# Altium PCB PONG_2.PcbDoc (part 3 of 3)
Units mm, origin at the board's own origin, x right, y up, seen from the top; angles counter-clockwise.
Board outline 310.01 x 220.09 mm, 2 copper layers (Top Layer, Bottom Layer); 106 components, 226 nets, 1005 pads, 373 vias.
Unrouted connection lines stored in the file: 5.
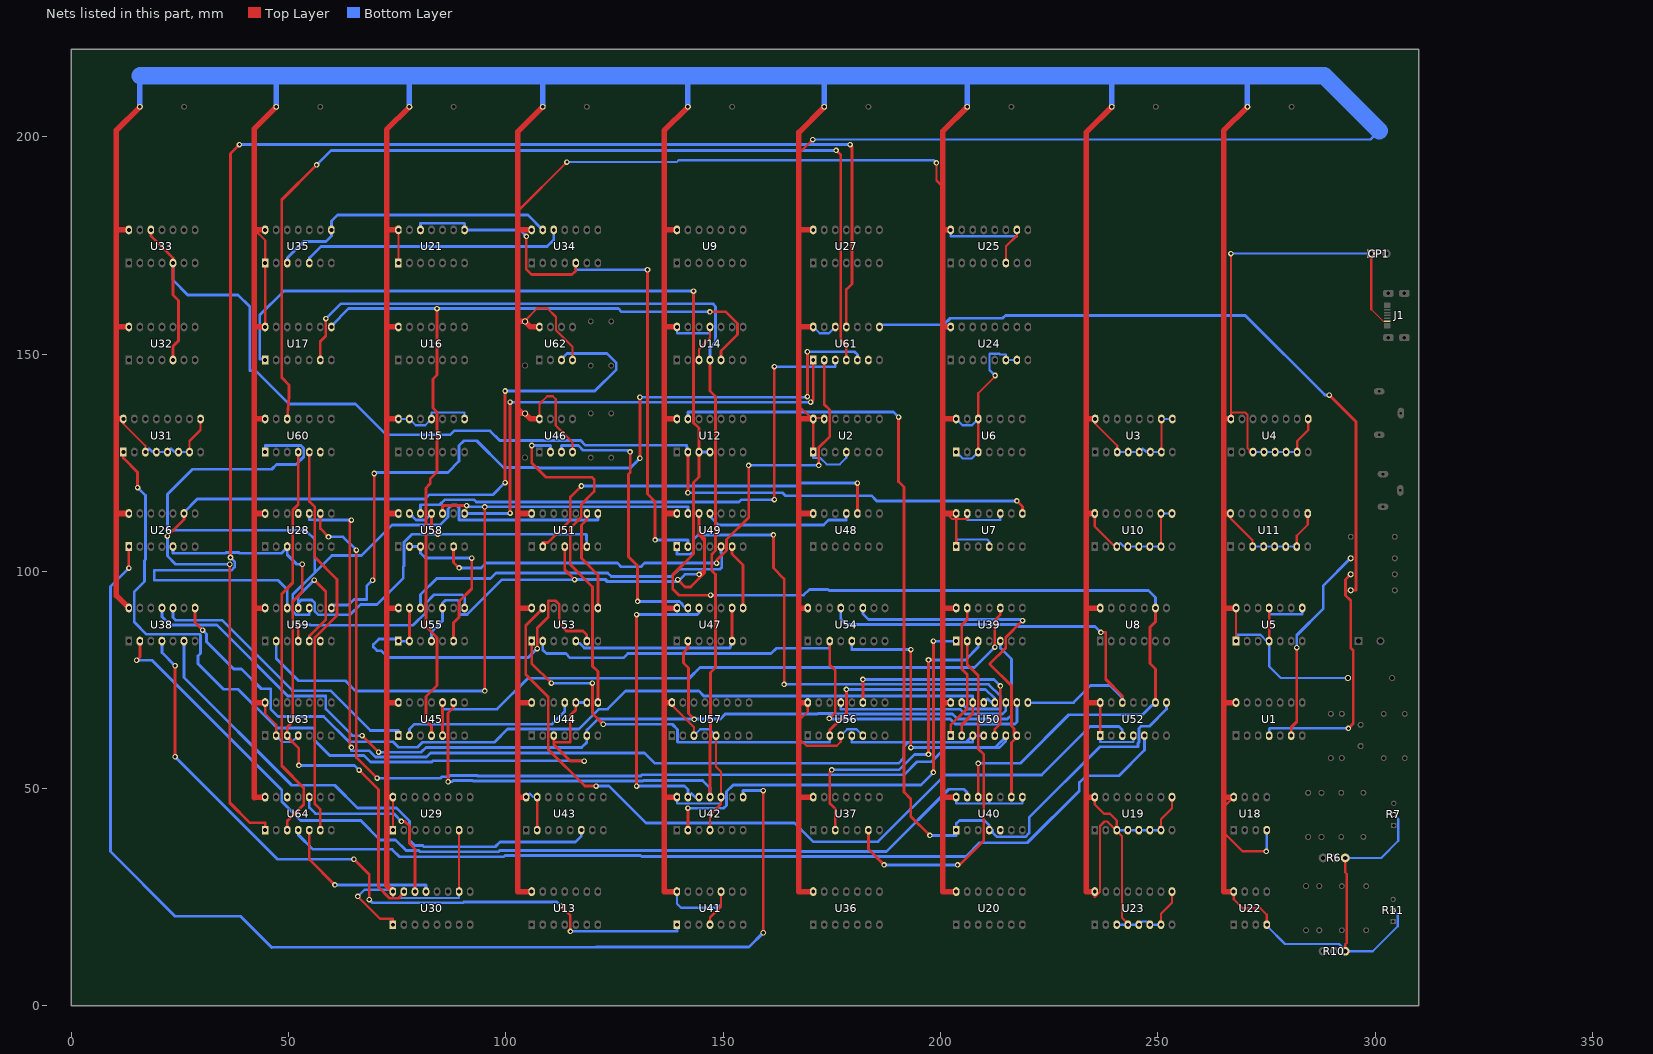
[diagram p3: the nets of this part, all layers, seen from the top]

## Via types
v1: diameter 1.27, hole 0.711, Top Layer to Bottom Layer, 373 vias

## Nets (pads, with @x,y where several pads share a name; then routed paths per layer and width w, separated by ;. In a path a pad name is that pad's centre, name@x,y a point inside that pad or via, vN(x,y) a via of type N, cw(c..) or ccw(c..) an arc to the next point about the centre after c; other vN are vias at no path point) (continued)
NetU34_12: U34.12 U35.5 | length 61.4
  Bottom Layer w0.635: U35.5@54.737,170.942 54.737,172.085 57.404,174.752 109.474,174.752 110.989,176.267 U34.12@110.989,178.562
NetU34_13: U34.13 U35.3 U35.8 | length 67.5
  Bottom Layer w0.635: U35.3@49.657,170.942 49.657,172.085 53.467,175.895 58.547,175.895 59.817,177.165 U35.8@59.817,178.562 59.817,180.594 61.214,181.991 105.02,181.991 U34.13@108.449,178.562
NetU37_3: U37.3 U39.3 | length 74.1
  Top Layer w0.635: v1(174.955,54.305) 174.523,53.873 174.523,46.533 175.784,45.272 U37.3@175.784,40.422 ; v1(197.231,57.861) v1(197.231,79.604)
  Bottom Layer w0.635: v1(174.955,54.305) 190.431,54.305 193.987,57.861 v1(197.231,57.861) ; v1(197.231,79.604) 205.736,79.604 208.682,82.55 U39.3@208.682,83.929
NetU37_6: U37.6 U39.2 | length 82.2
  Top Layer w0.635: U37.6@183.404,40.422 183.404,36.068 v1(187.036,32.436) ; v1(203.937,32.436) 204.387,32.436 209.956,38.005 209.956,57.861 208.686,59.131 208.686,75.997 206.142,78.541 U39.2@206.142,83.929
  Bottom Layer w0.635: v1(187.036,32.436) v1(203.937,32.436)
NetU38_2: U38.2 U40.13 | length 223.1
  Top Layer w0.635: v1(15.011,79.527) 15.748,80.264 U38.2@15.748,83.929
  Bottom Layer w0.635: v1(15.011,79.527) 18.505,79.527 48.387,49.645 48.387,47.015 52.756,42.647 66.573,42.647 71.044,38.176 74.6,38.176 77.041,35.735 79.953,35.735 80.222,35.466 98.281,35.466 98.572,35.758 167.436,35.758 167.691,35.504 187.548,35.504 201.879,49.835 205.38,49.835 206.142,49.073 U40.13@206.142,48.042
NetU38_4: U38.4 U41.1 | length 167.2
  Top Layer w0.635: v1(23.851,57.328) v1(23.851,78.257) ; v1(64.999,33.731) 68.529,30.201 v1(68.529,24.435) ; v1(112.573,23.038) 114.808,20.803 v1(114.808,17.145)
  Bottom Layer w0.635: U38.4@20.828,83.929 20.828,81.28 v1(23.851,78.257) ; v1(23.851,57.328) 47.447,33.731 v1(64.999,33.731) ; v1(68.529,24.435) 69.22,23.744 90.14,23.744 90.297,23.901 111.709,23.901 v1(112.573,23.038) ; v1(114.808,17.145) 139.33,17.145 U41.1@139.33,18.669
NetU38_6: U38.6 U43.6 | length 120.9
  Bottom Layer w0.635: U38.6@25.908,83.929 25.908,75.554 50.687,50.775 60.584,50.775 65.816,45.542 74.778,45.542 77.775,42.545 77.775,38.1 79.004,36.87 80.819,36.87 81.088,36.601 97.536,36.601 98.663,37.728 115.96,37.728 117.339,39.107 U43.6@117.339,40.422
NetU38_10: U38.10 U45.1 | length 66
  Bottom Layer w0.635: U38.10@23.368,91.549 23.368,89.36 23.971,88.757 34.604,88.757 50.826,72.535 59.635,72.535 68.78,63.39 75.243,63.39 U45.1@75.243,62.176
NetU39_1: U39.1 U42.2 | length 102.3
  Top Layer w0.635: U42.2@141.87,40.422 v1(141.87,45.491) ; v1(198.374,53.727) v1(198.374,83.922)
  Bottom Layer w0.635: v1(141.87,45.491) 150.114,45.491 150.77,46.148 150.77,49.301 152.302,50.833 195.48,50.833 v1(198.374,53.727) ; v1(198.374,83.922) 203.602,83.922 U39.1@203.602,83.929
NetU39_10: U39.10 U45.5 U45.10 | length 151.7
  Top Layer w0.635: U45.5@85.403,62.176 U45.10@85.403,69.796 ; v1(212.496,82.55) 212.496,88.752 213.762,90.018 U39.10@213.762,91.549
  Bottom Layer w0.635: U45.10@85.403,69.796 85.403,68.275 97.942,68.275 105.053,75.386 142.168,75.386 144.671,77.889 207.835,77.889 v1(212.496,82.55)
NetU39_13: U39.13 U50.1 | length 32
  Top Layer w0.635: U50.1@202.332,62.176 202.332,64.639 206.146,68.453 206.146,76.212 204.876,77.482 204.876,87.681 206.142,88.947 U39.13@206.142,91.549
NetU42_12: U42.12 U42.13 U47.12 | length 72.2
  Top Layer w0.635: v1(130.048,50.571) v1(130.048,90.035)
  Bottom Layer w0.635: v1(130.048,50.571) 132.588,50.571 132.613,50.597 141.046,50.597 141.87,49.773 U42.13@141.87,48.042 142.687,48.86 143.505,48.042 U42.12@144.41,48.042 ; v1(130.048,90.035) 144.021,90.035 144.41,90.424 U47.12@144.41,91.549
NetU44_8: U44.8 U46.2 | length 82
  Top Layer w0.635: v1(105.918,128.949) 105.918,124.904 109.156,121.666 119.736,121.666 120.294,121.107 120.294,118.358 117.329,115.392 117.329,112.477 114.808,109.957 114.808,101.502 119.888,96.422 119.888,78.156 121.149,76.895 U44.8@121.149,69.796
  Bottom Layer w0.635: v1(105.918,128.949) 110.236,128.949 U46.2@110.236,127.435
NetU46_3: U46.3 U47.13 | length 65.8
  Top Layer w0.635: v1(128.575,127.483) 128.575,122.758 128.194,122.377 128.194,103.353 130.277,101.27 v1(130.277,93.062)
  Bottom Layer w0.635: U46.3@112.776,127.435 112.776,128.949 116.662,128.949 117.763,127.848 127.901,127.848 128.266,127.483 v1(128.575,127.483) ; v1(130.277,93.062) 139.954,93.062 140.589,92.427 140.589,92.278 141.072,91.796 141.87,91.796 U47.13@141.87,91.549
NetU47_6: U47.6 U47.9 U53.5 | length 45.7
  Top Layer w0.635: U47.6@152.03,83.929 U47.9@152.03,91.549
  Bottom Layer w0.635: U53.5@116.069,83.929 116.069,83.467 116.922,83.467 118.025,82.364 151.552,82.364 U47.6@152.03,83.929
NetU47_8: U47.8 U49.6 | length 15.2
  Top Layer w0.635: U49.6@152.03,105.682 152.03,103.977 154.57,101.437 U47.8@154.57,91.549
NetU48_10: U48.10 U51.2 | length 89.1
  Top Layer w0.635: U51.2@108.449,105.682 108.449,106.629 109.652,106.629 114.808,111.785 114.808,117.069 v1(117.366,119.627) ; U48.10@180.864,113.302 v1(180.864,120.31)
  Bottom Layer w0.635: v1(117.366,119.627) 167.114,119.627 167.797,120.31 v1(180.864,120.31)
NetU48_11: U48.11 U49.11 | length 34.9
  Bottom Layer w0.635: U49.11@146.95,113.302 146.95,112.574 148.87,110.654 173.099,110.654 174.23,111.785 178.324,111.785 U48.11@178.324,113.302
NetU49_1: U49.1 U50.15 | length 126.3
  Top Layer w0.635: v1(161.544,108.363) 161.544,100.736 164.008,98.273 v1(164.008,73.99)
  Bottom Layer w0.635: U49.1@139.33,105.682 139.33,103.937 142.494,103.937 143.129,104.572 143.129,107.315 144.177,108.363 v1(161.544,108.363) ; v1(164.008,73.99) 211.074,73.99 213.766,71.298 213.766,68.282 206.135,68.282 204.872,69.545 U50.15@204.872,69.796
NetU49_5: U49.5 U55.12 | length 80.6
  Bottom Layer w0.635: U55.12@80.323,91.549 80.323,94.619 84.065,98.361 96.417,98.361 97.685,99.629 123.392,99.629 124.241,98.779 138.055,98.779 139.748,100.472 149.265,100.472 149.629,100.836 149.629,104.066 149.49,104.206 U49.5@149.49,105.682
NetU49_12: U49.12 U51.4 U55.4 U55.10 | length 120.1
  Top Layer w0.635: U51.4@113.529,105.682 113.529,100.364 v1(115.8,98.094) ; v1(139.522,98.069) 141.207,96.385 142.494,96.385 145.69,99.581 145.69,100.566 ; U49.12@144.41,113.302 144.41,108.951 ; v1(144.42,99.296) 145.69,100.566 ; 144.41,108.951 145.69,107.671 145.69,107.036 ; 144.41,108.951 144.41,108.316 145.69,107.036 ; 145.69,100.566 145.69,107.036
  Bottom Layer w0.635: U55.4@82.863,83.929 82.863,86.035 85.403,88.575 U55.10@85.403,91.549 85.403,92.71 86.038,93.345 88.849,93.345 89.223,92.971 89.223,90.035 91.059,90.035 99.093,98.069 122.681,98.069 123.106,97.644 123.474,97.644 ; v1(115.8,98.094) 123.025,98.094 123.474,97.644 ; v1(139.522,98.069) v1@139.097,97.644 ; v1(144.42,99.296) 141.18,99.296 139.529,97.644 v1@139.097,97.644 ; 123.474,97.644 v1@139.097,97.644
NetU49_13: U49.13 U58.10 U59.2 | length 157.3
  Top Layer w0.635: U58.10@85.403,113.302 85.403,115.113 v1(90.932,115.113) ; v1(95.104,72.466) v1(95.104,114.833)
  Bottom Layer w0.635: U59.2@47.117,83.929 47.117,79.987 52.285,74.819 63.054,74.819 65.407,72.466 v1(95.104,72.466) ; v1(90.932,115.113) 91.211,114.833 v1(95.104,114.833) 141.87,114.833 U49.13@141.87,113.302
NetU51_6: U51.6 U58.11 U58.13 U59.5 U59.11 | length 123.7
  Top Layer w0.635: U59.5@54.737,83.929 54.737,85.12 58.547,88.93 58.547,95.301 v1(55.882,97.965) ; U58.11@82.863,113.302 82.863,109.971 v1(84.296,108.538)
  Bottom Layer w0.635: U59.11@52.197,91.549 52.197,92.71 ; v1(55.882,97.965) 52.197,94.28 52.197,92.71 ; U58.13@77.783,113.302 77.783,113.234 77.851,113.234 79.3,111.785 81.346,111.785 U58.11@82.863,113.302 ; v1(84.296,108.538) v1@84.296,108.534 ; 52.197,92.71 52.908,93.421 55.296,93.421 56.007,92.71 56.007,90.78 56.769,90.018 64.156,90.018 66.499,92.361 70.289,92.361 76.378,98.451 76.378,101.067 76.505,101.194 76.505,106.68 78.359,108.534 v1@84.296,108.534 ; v1@84.296,108.534 118.457,108.534 ; 118.457,108.534 118.609,108.382 U51.6@118.609,105.682 118.457,108.534
NetU51_8: U51.8 U59.10 U60.1 | length 192
  Bottom Layer w0.635: U60.1@44.577,127.435 44.577,128.956 52.781,128.956 53.467,128.27 53.467,126.365 51.664,124.562 47.177,124.562 46.093,123.477 27.838,123.477 22.098,117.737 22.098,109.855 22.53,109.423 53.899,109.423 56.007,107.315 56.007,99.695 ; U59.10@54.737,91.549 54.737,90.018 51.689,90.018 50.927,90.78 50.927,94.615 56.007,99.695 ; U51.8@121.149,113.302 121.149,111.785 89.205,111.785 89.205,114.632 88.519,115.318 87.683,115.318 86.665,114.3 86.665,112.471 84.844,110.65 73.77,110.65 66.726,103.607 59.919,103.607 56.007,99.695
NetU51_9: U51.9 U53.8 | length 23.9
  Top Layer w0.635: U51.9@118.609,113.302 118.609,111.915 117.348,110.654 117.348,102.995 121.149,99.194 U53.8@121.149,91.549
NetU52_5: U52.5 U64.4 | length 212.7
  Bottom Layer w0.635: U64.4@52.197,40.422 52.197,39.37 55.552,36.015 73.746,36.015 75.429,34.331 99.456,34.331 99.748,34.623 130.956,34.623 131.211,34.369 205.876,34.369 209.031,37.524 219.964,37.524 231.943,49.503 231.943,51.435 233.438,52.929 241.011,52.929 246.915,58.833 U52.5@246.915,62.176
NetU53_6: U53.6 U55.1 U55.2 U55.13 | length 85.4
  Top Layer w0.635: U55.2@77.783,83.929 U55.13@77.783,91.549 ; v1(107.188,82.22) 107.188,86.97 109.728,89.51 109.728,93.218 111.379,93.218 112.268,92.329 112.268,87.884 113.894,86.258 117.729,86.258 118.609,85.378 U53.6@118.609,83.929
  Bottom Layer w0.635: U55.2@77.783,83.929 U55.1@75.243,83.929 75.243,84.447 70.739,84.447 69.477,83.185 69.477,82.55 70.297,81.729 71.236,81.729 72.82,80.145 105.113,80.145 v1(107.188,82.22)
NetU55_6: U55.6 U58.2 U58.3 | length 37.2
  Top Layer w0.635: U55.6@87.943,83.929 87.943,88.163 89.205,89.425 89.205,93.066 92.126,95.987 v1(92.126,103.048)
  Bottom Layer w0.635: U58.2@77.783,105.682 U58.3@80.323,105.682 80.323,104.165 81.455,103.034 92.112,103.034 v1(92.126,103.048)
NetU55_8: U55.8 U59.4 | length 49
  Top Layer w0.635: U59.4@52.197,83.929 v1(52.197,87.716)
  Bottom Layer w0.635: v1(52.197,87.716) 54.887,87.716 55.02,87.582 78.616,87.582 81.585,90.551 81.585,92.71 83.49,94.615 89.84,94.615 90.483,93.972 U55.8@90.483,91.549
NetU58_6: U58.6 U61.2 | length 133.4
  Top Layer w0.635: U58.6@87.943,105.682 87.943,102.023 v1(89.202,100.764) ; v1(148.488,101.899) 148.488,102.54 150.749,104.801 150.749,107.29 155.854,112.395 v1(155.854,124.384) ; v1(171.983,124.384) 171.983,128.448 174.523,130.988 174.523,137.135 173.244,138.414 U61.2@173.244,148.611
  Bottom Layer w0.635: v1(89.202,100.764) 94.28,100.764 95.415,101.899 125.662,101.899 126.511,101.049 131.038,101.049 131.887,101.899 v1(148.488,101.899) ; v1(155.854,124.384) v1(171.983,124.384)
NetU58_8: U58.8 U61.1 | length 115.1
  Top Layer w0.635: v1(100.94,113.399) v1(100.94,138.918) ; v1(170.101,138.918) 170.704,139.521 U61.1@170.704,148.611
  Bottom Layer w0.635: U58.8@90.483,113.302 90.483,113.284 100.825,113.284 v1(100.94,113.399) ; v1(100.94,138.918) v1(170.101,138.918)
NetU58_12: U58.12 U61.3 | length 130.5
  Top Layer w0.635: v1(161.747,116.484) v1(161.747,147.098)
  Bottom Layer w0.635: U58.12@80.323,113.302 80.323,115.316 84.753,115.316 85.89,116.453 92.692,116.453 93.169,115.976 153.645,115.976 154.153,116.484 v1(161.747,116.484) ; v1(161.747,147.098) 175.784,147.098 U61.3@175.784,148.611
NetU59_6: U59.6 U61.6
NetU59_8: U59.8 U61.5 | length 184.9
  Top Layer w0.635: v1(69.291,97.942) 69.69,98.341 v1(69.69,122.504) ; v1(130.835,126.009) v1(130.835,140.053) ; v1(169.367,140.208) v1(169.367,150.52)
  Bottom Layer w0.635: U59.8@59.817,91.549 59.817,92.235 63.754,92.235 65.016,93.496 67.945,93.496 67.945,96.596 v1(69.291,97.942) ; v1(69.69,122.504) 69.944,122.758 86.614,122.758 89.205,125.349 89.205,128.905 90.348,130.048 93.269,130.048 99.416,123.9 107.476,123.9 107.599,123.777 128.603,123.777 v1(130.835,126.009) ; v1(130.835,140.053) 169.212,140.053 v1(169.367,140.208) ; v1(169.367,150.52) 180.204,150.52 180.864,149.86 U61.5@180.864,148.611
NetU59_12: U59.12 U61.11 | length 338.5
  Top Layer w0.635: v1(36.601,103.175) 36.601,196.164 v1(38.633,198.196) ; U61.11@178.324,156.231 178.324,164.821 179.603,166.1 179.603,197.764 v1(179.172,198.196)
  Bottom Layer w0.635: v1(36.601,103.175) 37.567,102.21 37.567,100.965 36.83,100.228 19.058,100.228 19.058,97.942 47.549,97.942 49.657,95.834 U59.12@49.657,91.549 ; v1(38.633,198.196) v1(179.172,198.196)
NetU60_6: U60.6 U64.12
NetU60_12: U60.12 U61.4 | length 232.7
  Top Layer w0.635: U60.12@49.657,135.055 50.081,140.256 50.081,142.9 48.387,144.594 48.387,185.496 v1(56.413,193.523) ; v1(175.971,196.858) 177.063,195.766 177.063,153.289 178.324,152.028 U61.4@178.324,148.611
  Bottom Layer w0.635: v1(56.413,193.523) 59.749,196.858 v1(175.971,196.858)
PAD1: U14.4 U17.6 U42.11 U45.9 | length 298.8
  Top Layer w0.635: U17.6@57.277,148.611 57.277,152.933 58.547,154.203 v1(58.547,158.14) ; v1(86.665,51.562) 86.665,67.353 87.943,68.631 U45.9@87.943,69.796 ; U42.11@146.95,48.042 146.95,60.64 147.066,60.757 147.066,76.683 148.222,77.839 148.222,99.301 147.345,100.178 147.345,103.901 148.22,104.775 148.22,140.233 146.95,141.503 U14.4@146.95,148.611
  Bottom Layer w0.635: v1(58.547,158.14) 62.001,161.595 147.574,161.595 148.23,160.939 148.23,152.705 146.95,151.424 U14.4@146.95,148.611 ; v1(86.665,51.562) 87.563,51.562 87.86,51.859 92.241,51.859 92.385,51.714 131.489,51.714 131.637,51.863 145.252,51.863 146.95,50.165 U42.11@146.95,48.042
PAD2: U14.5 U17.8 U45.4 | length 209.5
  Top Layer w0.635: U45.4@82.863,62.176 82.863,64.254 81.585,65.532 81.585,71.196 84.125,73.736 84.125,84.76 81.585,87.3 81.585,119.177 82.55,120.142 82.55,121.272 84.125,122.847 84.125,136.677 83.21,137.592 83.21,144.247 84.125,145.161 v1(84.125,160.452) ; v1(146.939,159.715) 150.597,159.715 153.3,157.012 153.3,154.468 149.49,150.658 U14.5@149.49,148.611
  Bottom Layer w0.635: U17.8@59.817,156.231 59.817,156.489 63.779,160.452 v1(84.125,160.452) 125.882,160.452 126.619,159.715 v1(146.939,159.715)
R: U21.8 U21.12 U34.5 U49.2 | length 139.6
  Top Layer w0.635: v1(104.673,177.089) 104.673,174.422 104.648,174.396 104.648,169.545 105.9,168.293 115.189,168.293 116.069,169.173 U34.5@116.069,170.942 ; v1(132.563,169.393) 132.563,117.763 134.315,116.01 v1(134.315,107.213)
  Bottom Layer w0.635: U21.12@80.323,178.562 80.323,180.086 90.3,180.086 90.483,179.903 U21.8@90.483,178.562 103.2,178.562 v1(104.673,177.089) ; U34.5@116.069,170.942 116.069,169.393 v1(132.563,169.393) ; v1(134.315,107.213) 141.87,107.213 U49.2@141.87,105.682
"RST SPEED": U31.1 U44.3 U44.9 U44.10 | length 192.1
  Top Layer w0.635: U31.1@11.938,127.435 11.938,126.069 15.218,122.789 v1(15.218,119.275) ; U44.3@110.989,62.176 110.989,60.655 ; U44.10@116.069,69.796 116.069,68.148 114.808,66.887 114.808,60.655 110.989,60.655 ; v1(118.008,56.321) 114.799,56.321 110.989,60.131 110.989,60.655
  Bottom Layer w0.635: v1(15.218,119.275) 17.018,117.475 17.018,102.721 16.788,102.49 16.788,97.626 14.478,95.316 14.478,88.265 17.247,85.496 29.566,85.496 29.715,85.347 29.715,81.115 29.142,80.541 29.142,78.729 35.003,72.867 38.36,72.867 47.316,63.911 55.596,63.911 56.007,63.5 56.007,61.011 59.433,57.585 67.347,57.585 68.824,56.107 82.922,56.107 83.214,56.399 117.931,56.399 v1(118.008,56.321) ; U44.10@116.069,69.796 U44.9@118.609,69.796
RUN: U44.11 U45.2 | length 41
  Bottom Layer w0.635: U45.2@77.783,62.176 77.783,63.703 78.904,64.824 110.595,64.824 113.529,67.758 U44.11@113.529,69.796
SC: U26.9 U62.3 U64.1 | length 234.6
  Top Layer w0.635: v1(22.098,108.102) 25.908,111.912 U26.9@25.908,113.302 ; v1(36.424,101.625) 36.424,46.736 41.046,42.113 44.577,42.113 U64.1@44.577,40.422 ; v1(99.797,120.421) v1(99.797,141.489)
  Bottom Layer w0.635: v1(22.098,108.102) 22.098,103.505 23.978,101.625 v1(36.424,101.625) ; U26.9@25.908,113.302 25.908,113.563 28.956,116.611 81.35,116.611 82.326,117.588 96.963,117.588 v1(99.797,120.421) ; v1(99.797,141.489) 120.432,141.489 125.4,146.456 125.4,147.955 123.23,150.125 114.031,150.125 112.776,148.869 U62.3@112.776,148.611
SCORE: R5.1 U61.8 | length 161.2
  Top Layer w0.635: v1(289.458,140.564) 295.605,134.417 295.605,95.631 R5.1@294.386,95.631
  Bottom Layer w0.635: U61.8@185.944,156.231 185.944,156.753 200.746,156.753 202.235,158.242 214.3,158.242 214.952,158.894 270.112,158.894 288.442,140.564 v1(289.458,140.564)
SCORE1_1: U28.10 U50.3 U50.4 U56.5 | length 233.9
  Top Layer w0.635: v1(64.414,59.461) 64.065,59.811 64.065,111.788 64.412,111.788 v1(64.414,111.785)
  Bottom Layer w0.635: U28.10@54.737,113.302 54.737,111.841 56.119,111.841 56.175,111.785 v1(64.414,111.785) ; v1(64.414,59.461) 64.414,58.72 68.482,58.72 69.959,57.242 81.712,57.242 82.661,58.191 131.877,58.191 134.254,55.814 190.282,55.814 191.541,57.074 191.541,59.69 192.507,60.655 ; U56.5@179.594,62.176 179.594,60.655 192.507,60.655 ; U50.4@209.952,62.176 U50.3@207.412,62.176 U50.3@207.412,62.167 ; 192.507,60.655 205.9,60.655 ; 205.9,60.655 U50.3@207.412,62.167 ; 205.9,60.655 207.412,60.655 U50.3@207.412,62.167
SCORE1_2: U50.5 U56.11 | length 49.6
  Top Layer w0.635: U56.11@182.134,69.796 v1(182.134,75.128) ; U50.5@212.492,62.176 212.492,63.678 213.766,64.952 v1(213.766,73.625)
  Bottom Layer w0.635: v1(182.134,75.128) 212.263,75.128 v1(213.766,73.625)
SCORE1_4: U28.9 U50.6 U54.5 | length 267.4
  Top Layer w0.635: U28.9@57.277,113.302 57.277,109.804 v1(59.157,107.925) ; v1(65.557,104.889) 65.557,57.165 v1(70.333,52.39) ; v1(193.167,59.436) v1(193.167,81.991)
  Bottom Layer w0.635: v1(59.157,107.925) 62.522,107.925 v1(65.557,104.889) ; v1(70.333,52.39) 84.986,52.39 85.313,52.717 86.711,52.717 86.988,52.994 93.442,52.994 93.52,52.916 131.076,52.916 131.322,53.162 191.601,53.162 194.6,56.161 197.893,56.161 201.168,59.436 ; U54.5@179.594,83.929 179.594,81.991 v1(193.167,81.991) ; v1(193.167,59.436) 201.168,59.436 ; U50.6@215.032,62.176 U50.6@215.032,61.925 ; 201.168,59.436 212.543,59.436 ; 212.543,59.436 U50.6@215.032,61.925 ; 212.543,59.436 213.534,59.436 215.032,60.935 U50.6@215.032,61.925
SCORE1_8: U40.9 U50.7 U54.11 | length 85.9
  Top Layer w0.635: U40.9@216.302,48.042 216.302,60.614 217.572,61.884 U50.7@217.572,62.176 216.916,62.176 216.916,63.83 216.306,64.44 216.306,73.668 211.387,78.588 211.387,78.78 215.022,82.415 215.022,84.821 v1(218.872,88.672)
  Bottom Layer w0.635: U54.11@182.134,91.549 182.134,90.17 183.404,88.9 218.643,88.9 v1(218.872,88.672)
SCORE1_10: U28.11 U40.5
SCORE2_1: U50.12 U50.13 U53.1 U56.3 | length 139.9
  Top Layer w0.635: U53.1@105.909,83.929 105.909,78.781 v1(110.439,74.251) ; v1(119.888,74.251) 119.888,67.285 v1(122.377,64.795) ; U56.3@174.514,62.176 174.514,63.491 178.333,67.31 v1(178.333,72.822)
  Bottom Layer w0.635: v1(110.439,74.251) v1(119.888,74.251) ; v1(122.377,64.795) 138.252,64.795 139.446,63.602 139.446,60.782 139.573,60.655 174.514,60.655 U56.3@174.514,62.176 ; v1(178.333,72.822) 210.359,72.822 212.492,70.688 U50.12@212.492,69.796 211.714,69.796 210.833,70.677 U50.13@209.952,69.796
SCORE2_2: U50.11 U56.13 | length 42.2
  Bottom Layer w0.635: U56.13@177.054,69.796 177.054,68.275 204.498,68.275 205.626,67.147 214.249,67.147 215.032,67.93 U50.11@215.032,69.796
SCORE2_4: U50.10 U53.2 U54.3 | length 138.7
  Top Layer w0.635: v1(174.396,66.142) 175.793,67.539 175.793,77.191 174.514,78.47 U54.3@174.514,83.929
  Bottom Layer w0.635: U53.2@108.449,83.929 108.449,81.915 109.303,81.061 113.799,81.061 114.767,80.093 127.066,80.093 128.034,81.061 160.983,81.061 162.209,82.287 174.514,82.287 U54.3@174.514,83.929 ; v1(174.396,66.142) 174.536,66.002 202.228,66.002 203.353,64.877 217.157,64.877 217.572,65.292 U50.10@217.572,69.796
SCORE2_8: U50.9 U52.12 U54.13 | length 108.2
  Top Layer w0.635: v1(236.88,85.954) 238.023,85.954 238.023,75.159 241.835,71.347 U52.12@241.835,69.796
  Bottom Layer w0.635: U54.13@177.054,91.549 177.054,89.002 178.29,87.765 217.511,87.765 217.966,87.31 235.524,87.31 v1(236.88,85.954) ; U50.9@220.112,69.796 220.112,69.774 230.607,69.774 234.544,73.711 239.014,73.711 241.835,70.89 U52.12@241.835,69.796
SCORE2_10: U52.3 U53.13 | length 189.8
  Top Layer w0.635: U53.13@108.449,91.549 108.449,91.482 104.537,87.57 104.537,76.235 109.728,71.044 109.728,58.987 118.143,50.571 v1(120.752,50.571)
  Bottom Layer w0.635: v1(120.752,50.571) 123.722,50.571 132.207,42.086 166.374,42.086 170.687,37.774 185.631,37.774 201.002,53.144 223.273,53.144 234.399,64.27 241.065,64.27 241.835,63.5 U52.3@241.835,62.176
SCORESOUND: U60.4 U64.3 | length 92.3
  Top Layer w0.635: U64.3@49.657,40.422 49.657,42.545 53.467,46.355 53.467,50.165 48.39,55.242 48.39,94.821 50.927,97.358 50.927,114.122 52.197,115.392 U60.4@52.197,127.435
SERVE: U26.1 U42.8 | length 271.5
  Top Layer w0.635: v1(13.208,100.736) U26.1@13.208,105.682 ; v1(159.207,16.815) v1(159.207,49.53)
  Bottom Layer w0.635: v1(13.208,100.736) 8.986,96.515 8.986,35.489 23.849,20.626 38.886,20.626 46.085,13.427 120.729,13.524 155.917,13.524 v1(159.207,16.815) ; U42.8@154.57,48.042 154.57,49.53 v1(159.207,49.53)
SRST: U38.8 U50.2 U50.14 | length 214
  Top Layer w0.635: U38.8@28.448,91.549 28.448,88.24 v1(30.201,86.487) ; U50.2@204.872,62.176 204.872,64.694 207.412,67.234 U50.14@207.412,69.796
  Bottom Layer w0.635: v1(30.201,86.487) 31.089,85.598 31.089,83.789 37.36,77.518 39.14,77.518 43.684,72.974 45.847,72.974 45.847,68.275 47.557,66.565 58.047,66.565 63.833,60.78 73.987,60.78 75.247,59.52 79.611,59.52 80.747,60.655 97.333,60.655 100.367,63.689 116.826,63.689 121.412,68.275 123.342,68.275 127.533,72.466 144.374,72.466 145.517,71.323 207.412,71.323 U50.14@207.412,69.796
"STOP G": U38.11 U39.5 U44.6 U47.2 | length 278.2
  Top Layer w0.635: v1(66.904,62.179) v1(70.706,58.377) ; U47.2@141.87,83.929 141.87,82.307 140.843,81.28 140.843,78.897 141.986,77.754 141.986,67.285 v1(143.332,65.938)
  Bottom Layer w0.635: U38.11@20.828,91.549 20.828,89.535 22.741,87.622 33.469,87.622 49.782,71.309 58.547,71.309 58.547,68.275 64.643,62.179 v1(66.904,62.179) ; v1(70.706,58.377) 80.493,58.377 81.577,59.461 117.415,59.461 118.609,60.655 U44.6@118.609,62.176 118.609,63.5 121.047,65.938 ; v1(143.332,65.938) 121.047,65.938 ; U39.5@213.762,83.929 213.762,82.34 216.306,79.796 216.306,66.959 215.359,66.012 203.883,66.012 202.758,67.137 175.518,67.137 175.367,67.288 171.801,67.288 171.65,67.137 150.45,67.137 149.326,66.012 121.121,66.012 121.047,65.938
SYNC: R4.1 U1.4 | length 57
  Top Layer w0.635: v1(293.878,63.856) 294.97,64.948 294.97,81.813 294.411,82.372 294.411,93.214 293.188,94.437 293.188,98.116 R4.1@294.386,99.314
  Bottom Layer w0.635: U1.4@275.622,62.176 275.622,63.694 275.784,63.856 v1(293.878,63.856)
TOPBOTHITSOUND: U60.5 U64.6 | length 92.3
  Top Layer w0.635: U60.5@54.737,127.435 54.737,116.078 56.007,114.808 56.007,103.226 61.087,98.146 61.087,89.865 56.007,84.785 56.007,46.457 57.277,45.187 U64.6@57.277,40.422
VBLANK: U8.9 U12.3 U12.4 U17.1 U40.12 U52.9 | length 380.8
  Top Layer w0.635: v1(143.15,164.49) 143.15,134.192 144.41,132.933 U12.3@144.41,127.435 144.41,121.691 143.14,120.421 143.14,103.973 138.379,99.212 138.379,95.885 139.751,94.513 v1(147.066,94.513) ; U40.12@208.682,48.042 v1(208.682,55.8) ; U52.9@249.455,69.796 249.455,77.497 248.183,78.768 248.183,87.122 249.455,88.393 U8.9@249.455,91.549
  Bottom Layer w0.635: U17.1@44.577,148.611 44.577,148.869 43.307,148.869 43.307,158.928 48.87,164.49 v1(143.15,164.49) ; U12.3@144.41,127.435 U12.4@146.95,127.435 ; v1(147.066,94.513) 168.504,94.513 169.824,95.834 174.041,95.834 174.32,95.555 247.88,95.555 249.455,93.98 U8.9@249.455,91.549 ; v1(208.682,55.8) 218.334,55.8 229.514,66.98 246.507,66.98 248.717,69.19 249.455,69.19 U52.9@249.455,69.796
VCC: CN1.2 CN2.2 CN3.2 CN4.2 CN5.2 CN6.2 CN7.2 CN8.2 CN9.2 CP1.1 J1.1 R6.CW R7.2 R10.CW R11.2 R14.2 R15.2 R16.2 U1.14 U2.1 U2.4 U2.13 U2.14 U3.3 U3.4 U3.5 U3.6 U3.7 U3.9 U3.10 U3.16 U4.3 U4.4 U4.5 U4.6 U4.7 U4.9 U4.16 U5.1 U5.4 U5.8 U5.11 U5.14 U6.1 U6.3 U6.12 U6.14 U7.1 U7.4 U7.10 U7.13 U7.14 U8.14 U9.14 U10.3 U10.4 U10.5 U10.6 U10.7 U10.9 U10.10 U10.16 U11.3 U11.4 U11.5 U11.6 U11.7 U11.9 U11.16 U12.14 U13.14 U14.3 U14.11 U14.14 U15.8 U15.11 U15.13 U15.14 U16.14 U17.14 U18.4 U18.8 U19.3 U19.4 U19.5 U19.6 U19.7 U19.9 U19.16 U20.14 U21.1 U21.14 U22.4 U22.8 U23.3 U23.4 U23.5 U23.6 U23.7 U23.9 U23.16 U24.6 U24.7 U24.16 U25.6 U25.10 U25.16 U26.14 U27.14 U28.14 U29.1 U29.7 U29.16 U30.1 U30.10 U30.16 U31.3 U31.4 U31.5 U31.6 U31.7 U31.9 U31.16 U32.14 U33.14 U34.14 U35.1 U35.14 U36.14 U37.14 U38.14 U39.14 U40.8 U40.11 U40.14 U41.4 U41.10 U41.14 U42.4 U42.10 U42.14 U43.2 U43.15 U43.16 U44.14 U45.14 U46.4 U46.8 U47.14 U48.14 U49.14 U50.16 U51.14 U52.1 U52.4 U52.14 U53.14 U54.16 U55.14 U56.4 U56.6 U56.16 U57.3 U57.5 U57.16 U58.14 U59.14 U60.14 U61.12 U61.14 U62.4 U62.8 U63.2 U63.4 U63.14 U64.14 | length 3530.5
  Top Layer w0.175: 299.113,160.322 301.858,157.577 J1.1@302.756,157.577
  Top Layer w0.508: U31.16@11.938,135.055 11.938,133.985 17.018,128.905 U31.3@17.018,127.435 ; U31.7@27.178,127.435 27.178,129.972 29.718,132.512 U31.9@29.718,135.055 ; 42.164,178.562 44.577,176.149 U35.1@44.577,170.942 U17.14@44.577,156.231 ; U63.14@44.577,69.796 44.577,67.234 47.117,64.694 U63.2@47.117,62.176 ; v1(65.888,25.171) 70.993,20.066 73.973,20.066 U30.1@73.973,18.669 ; U29.1@73.973,40.422 U29.16@73.973,48.042 ; U21.1@75.243,170.942 U21.14@75.243,178.562 ; U30.10@89.213,26.289 U29.7@89.213,40.422 ; 102.849,157.501 102.849,137.871 R15.2@104.321,136.398 ; R16.2@104.288,157.607 107.209,160.528 109.474,160.528 111.506,158.496 111.506,155.473 115.316,151.663 U62.4@115.316,148.611 ; R15.2@104.394,136.325 R15.2@104.321,136.398 ; U43.2@107.179,40.422 U43.15@107.179,48.042 ; U46.8@107.696,135.055 107.696,138.506 109.474,140.284 110.744,140.284 111.455,139.573 111.455,133.553 115.316,129.692 U46.4@115.316,127.435 ; v1(113.995,194.158) 102.743,182.905 102.743,178.562 102.743,137.16 103.505,136.398 R15.2@104.321,136.398 ; 136.452,69.796 137.595,69.796 143.256,64.135 U57.3@143.256,62.176 ; U14.3@144.41,148.611 144.41,151.13 146.95,153.67 U14.11@146.95,156.231 ; U41.4@146.95,18.669 146.95,20.32 149.49,22.86 U41.10@149.49,26.289 ; U42.4@146.95,40.422 146.95,43.929 149.49,46.469 U42.10@149.49,48.042 149.49,53.858 148.336,55.012 U57.5@148.336,62.176 ; U56.16@169.434,69.796 169.434,67.691 167.386,65.643 167.386,61.595 169.139,59.842 176.149,59.842 177.054,60.747 U56.4@177.054,62.176 ; v1(170.586,199.365) 167.386,196.164 167.386,178.562 167.386,156.231 167.386,138.1 170.18,135.306 173.244,135.306 U2.13@173.244,135.055 ; U2.1@170.704,127.435 U2.14@170.704,135.055 ; v1(199.06,194.005) 199.06,189.916 200.533,188.443 200.533,178.562 200.533,156.231 200.533,135.055 200.533,114.148 202.671,112.01 203.602,112.01 ; U7.1@203.602,105.682 203.602,112.01 ; U7.14@203.602,113.302 203.602,112.01 ; U7.13@206.142,113.302 206.142,112.01 203.602,112.01 ; U6.3@208.682,127.435 U6.12@208.682,135.055 208.682,140.952 212.478,144.748 212.478,145.059 v1(212.547,145.059) ; U25.6@215.032,170.942 215.032,174.752 217.572,177.292 U25.10@217.572,178.562 ; U23.16@235.485,26.289 235.485,25.018 236.703,26.236 236.703,41.377 237.744,42.418 238.379,42.418 241.783,39.014 241.783,20.245 243.105,18.923 U23.4@243.105,18.669 ; U19.16@235.485,48.042 235.485,46.355 237.618,44.221 239.014,44.221 240.565,42.671 U19.3@240.565,40.422 ; U10.16@235.485,113.302 235.485,110.312 239.801,105.995 240.565,105.995 U10.3@240.565,105.682 ; U3.16@235.585,135.055 235.585,133.985 240.665,128.905 U3.3@240.665,127.435 ; U52.1@236.755,62.176 U52.14@236.755,69.796 ; U23.7@250.725,18.669 250.725,21.209 253.265,23.749 U23.9@253.265,26.289 ; U19.7@250.725,40.422 250.725,42.951 253.265,45.491 U19.9@253.265,48.042 ; U10.7@250.725,105.682 U10.10@250.725,113.302 ; U3.7@250.825,127.435 U3.10@250.825,135.055 ; U11.16@266.732,113.302 266.732,112.217 271.812,107.137 U11.3@271.812,105.682 ; U4.16@266.827,135.055 266.827,136.246 ; v1(266.827,173.101) 266.827,136.246 ; U22.8@267.462,26.289 267.462,24.511 269.494,22.479 273.558,22.479 275.082,20.955 U22.4@275.082,18.669 ; U18.8@267.462,48.042 265.176,45.756 265.176,39.878 269.494,35.56 v1(274.955,35.56) ; U5.1@268.002,83.929 U5.14@268.002,91.549 ; U4.3@271.907,127.435 271.145,127.435 271.145,127.838 270.637,128.346 270.637,136.042 270.154,136.525 267.106,136.525 266.827,136.246 ; U5.4@275.622,83.929 U5.11@275.622,91.549 ; U11.7@281.972,105.682 281.972,108.204 284.512,110.744 U11.9@284.512,113.302 ; U4.7@282.067,127.435 282.067,129.972 284.607,132.512 U4.9@284.607,135.055 ; R10.CW@293.116,12.573 293.116,14.173 293.472,14.529 293.472,30.353 293.116,30.709 R6.CW@293.116,34.036 ; 299.113,160.322 CP1.1@299.113,173.101
  Top Layer w1.27: 10.361,113.302 U26.14@13.208,113.302 ; 10.361,135.055 U31.16@11.938,135.055 ; 10.361,156.231 U32.14@13.208,156.231 ; 10.361,178.562 U33.14@13.208,178.562 ; U38.14@13.208,91.549 10.361,94.396 10.361,201.496 CN1.2@15.748,206.883 ; 42.037,69.796 U63.14@44.577,69.796 ; 42.037,91.549 U59.14@44.577,91.549 ; 42.037,113.302 U28.14@44.577,113.302 ; 42.037,135.055 U60.14@44.577,135.055 ; 42.037,156.231 U17.14@44.577,156.231 ; 42.164,178.562 U35.14@44.577,178.562 ; U64.14@44.577,48.042 42.2,48.042 42.037,47.879 42.037,201.803 CN2.2@47.117,206.883 ; 72.517,69.796 U45.14@75.243,69.796 ; 72.517,91.549 U55.14@75.243,91.549 ; 72.517,113.302 U58.14@75.243,113.302 ; 72.517,135.055 U15.14@75.243,135.055 ; 72.517,156.231 U16.14@75.243,156.231 ; 72.517,178.562 U21.14@75.243,178.562 ; U30.16@73.973,26.289 72.517,27.745 72.517,48.042 ; U29.16@73.973,48.042 72.517,48.042 ; CN3.2@77.783,206.883 72.517,201.617 72.517,48.042 ; 102.743,48.042 U43.16@104.639,48.042 ; 102.743,69.796 U44.14@105.909,69.796 ; 102.743,91.549 U53.14@105.909,91.549 ; 102.743,113.302 U51.14@105.909,113.302 ; 102.743,136.325 R15.2@104.394,136.325 ; 102.743,178.562 U34.14@105.909,178.562 ; 102.849,157.501 R16.2@104.394,157.501 ; R16.2@104.288,157.607 R16.2@104.394,157.501 ; R15.2@104.321,136.398 R15.2@104.394,136.325 ; U13.14@105.909,26.289 102.743,26.289 102.743,201.177 CN4.2@108.449,206.883 ; U46.8@107.696,135.055 105.664,135.055 R15.2@104.394,136.325 ; U62.8@107.696,156.231 105.664,156.231 R16.2@104.394,157.501 ; 136.398,48.042 U42.14@139.33,48.042 ; 136.398,91.549 U47.14@139.33,91.549 ; 136.398,113.302 U49.14@139.33,113.302 ; 136.398,135.055 U12.14@139.33,135.055 ; 136.398,156.231 U14.14@139.33,156.231 ; 136.398,178.562 U9.14@139.33,178.562 ; 136.452,69.796 U57.16@138.176,69.796 ; U41.14@139.33,26.289 136.398,26.289 136.398,201.411 CN5.2@141.87,206.883 ; 167.386,48.042 U37.14@170.704,48.042 ; 167.386,69.796 U56.16@169.434,69.796 ; 167.386,91.549 U54.16@169.434,91.549 ; 167.386,113.302 U48.14@170.704,113.302 ; 167.386,135.055 U2.14@170.704,135.055 ; 167.386,156.231 U61.14@170.704,156.231 ; 167.386,178.562 U27.14@170.704,178.562 ; U36.14@170.704,26.289 167.386,26.289 167.386,201.025 CN6.2@173.244,206.883 ; 200.533,48.042 U40.14@203.602,48.042 ; 200.533,69.796 U50.16@202.332,69.796 ; 200.533,91.549 U39.14@203.602,91.549 ; 200.533,113.302 U7.14@203.602,113.302 ; 200.533,135.055 U6.14@203.602,135.055 ; 200.533,156.231 U24.16@202.332,156.231 ; 200.533,178.562 U25.16@202.332,178.562 ; U20.14@203.602,26.289 200.533,26.289 200.533,201.274 CN7.2@206.142,206.883 ; 233.553,48.042 U19.16@235.485,48.042 ; 233.553,69.796 U52.14@236.755,69.796 ; 233.553,91.549 U8.14@236.755,91.549 ; 233.553,113.302 U10.16@235.485,113.302 ; 233.553,135.055 U3.16@235.585,135.055 ; U23.16@235.485,26.289 233.553,26.289 233.553,201.041 CN8.2@239.395,206.883 ; 265.155,113.302 U11.16@266.732,113.302 ; 265.155,135.055 U4.16@266.827,135.055 ; 265.176,48.042 U18.8@267.462,48.042 ; 265.176,69.796 U1.14@268.002,69.796 ; 265.176,91.549 U5.14@268.002,91.549 ; U22.8@267.462,26.289 265.176,26.289 265.176,104.308 265.155,104.329 265.155,201.401 CN9.2@270.637,206.883
  Bottom Layer w0.508: U31.3@17.018,127.435 17.836,128.253 18.653,127.435 U31.4@19.558,127.435 U31.5@22.098,127.435 22.916,128.253 23.733,127.435 U31.6@24.638,127.435 U31.7@27.178,127.435 ; U63.2@47.117,62.176 48.587,60.706 50.727,60.706 U63.4@52.197,62.176 ; v1(65.888,25.171) 67.437,26.721 73.973,26.721 U30.16@73.973,26.289 73.973,24.816 89.213,24.816 U30.10@89.213,26.289 ; U15.14@75.243,135.055 U15.13@77.783,135.055 79.234,133.604 81.412,133.604 U15.11@82.863,135.055 82.863,136.525 90.483,136.525 U15.8@90.483,135.055 ; U43.16@104.639,48.042 105.456,48.86 106.274,48.042 U43.15@107.179,48.042 ; v1(113.995,194.158) 139.268,194.158 139.695,194.585 198.48,194.585 v1(199.06,194.005) ; U41.14@139.33,26.289 139.33,23.495 140.266,22.558 148.711,22.558 149.49,23.337 U41.10@149.49,26.289 ; U42.14@139.33,48.042 139.33,46.586 149.49,46.586 U42.10@149.49,48.042 ; U14.14@139.33,156.231 139.33,154.762 146.95,154.762 U14.11@146.95,156.231 ; U57.3@143.256,62.176 144.707,63.627 146.885,63.627 U57.5@148.336,62.176 ; v1(170.586,199.365) 298.933,199.365 300.926,201.358 ; U2.1@170.704,127.435 170.704,126.088 172.341,126.088 173.826,124.603 176.784,124.603 178.324,126.143 U2.4@178.324,127.435 ; U61.14@170.704,156.231 172.173,154.762 174.315,154.762 U61.12@175.784,156.231 ; U56.4@177.054,62.176 178.505,63.627 180.683,63.627 U56.6@182.134,62.176 ; U25.16@202.332,178.562 202.332,177.125 204.633,177.125 204.67,177.089 217.572,177.089 U25.10@217.572,178.562 ; U40.14@203.602,48.042 203.602,46.584 211.222,46.584 ; U7.1@203.602,105.682 203.602,107.315 210.718,107.315 211.222,106.811 U7.4@211.222,105.682 ; U6.1@203.602,127.435 205.054,125.984 207.231,125.984 U6.3@208.682,127.435 ; U6.14@203.602,135.055 205.054,133.604 207.231,133.604 U6.12@208.682,135.055 ; U7.13@206.142,113.302 206.142,111.836 213.762,111.836 U7.10@213.762,113.302 ; U40.11@211.222,48.042 211.222,46.584 ; v1(212.547,145.059) 211.277,146.329 211.277,150.061 213.54,150.061 213.69,149.911 215.032,149.911 U24.6@215.032,148.611 U24.7@217.572,148.611 ; U40.8@218.842,48.042 218.842,46.584 211.222,46.584 ; U52.1@236.755,62.176 236.755,60.706 244.375,60.706 U52.4@244.375,62.176 ; U23.3@240.565,18.669 U23.4@243.105,18.669 U23.5@245.645,18.669 246.357,19.382 247.472,19.382 U23.6@248.185,18.669 U23.7@250.725,18.669 ; U19.3@240.565,40.422 U19.4@243.105,40.422 U19.5@245.645,40.422 U19.6@248.185,40.422 U19.7@250.725,40.422 ; U10.3@240.565,105.682 241.382,106.5 242.2,105.682 U10.4@243.105,105.682 U10.5@245.645,105.682 U10.6@248.185,105.682 U10.7@250.725,105.682 ; U3.3@240.665,127.435 U3.4@243.205,127.435 U3.5@245.745,127.435 246.563,128.253 247.38,127.435 U3.6@248.285,127.435 U3.7@250.825,127.435 ; U10.10@250.725,113.302 U10.9@253.265,113.302 ; U3.10@250.825,135.055 U3.9@253.365,135.055 ; v1(266.827,173.101) CP1.1@299.113,173.101 ; U5.1@268.002,83.929 268.002,85.395 273.609,85.395 274.853,84.15 275.622,84.15 U5.4@275.622,83.929 275.622,78.105 278.289,75.438 R14.2@293.751,75.438 ; U11.3@271.812,105.682 U11.4@274.352,105.682 U11.5@276.892,105.682 U11.6@279.432,105.682 U11.7@281.972,105.682 ; U4.3@271.907,127.435 U4.4@274.447,127.435 U4.5@276.987,127.435 U4.6@279.527,127.435 U4.7@282.067,127.435 ; v1(274.955,35.56) 275.082,35.687 U18.4@275.082,40.422 ; U22.4@275.082,18.669 275.082,18.415 279.273,14.224 291.719,14.224 292.481,13.462 292.481,12.573 R10.CW@293.116,12.573 299.441,12.573 305.206,18.339 305.206,20.93 R11.2@304.165,21.971 ; U5.11@275.622,91.549 275.622,90.094 283.242,90.094 U5.8@283.242,91.549 ; R6.CW@293.116,34.036 301.396,34.036 305.333,37.973 305.333,43.028 R7.2@304.292,44.069
  Bottom Layer w1.27: CN1.2@15.748,206.883 15.748,213.868 15.875,213.995 ; CN2.2@47.117,206.883 47.117,213.995 ; CN3.2@77.783,206.883 77.783,213.995 ; CN4.2@108.449,206.883 108.449,213.995 ; CN5.2@141.87,206.883 141.87,213.995 ; CN6.2@173.244,206.883 173.244,213.995 ; CN7.2@206.142,206.883 206.142,213.995 ; CN8.2@239.395,206.883 239.395,213.995 ; CN9.2@270.637,206.883 270.637,213.995
  Bottom Layer w4: 15.875,213.995 47.117,213.995 77.783,213.995 108.449,213.995 141.87,213.995 173.244,213.995 206.142,213.995 239.395,213.995 270.637,213.995 288.29,213.995 300.926,201.358
VIDEO: R3.1 U1.6 | length 46.5
  Top Layer w0.635: U1.6@280.702,62.176 280.702,64.116 281.965,65.38 v1(281.965,82.423)
  Bottom Layer w0.635: v1(281.965,82.423) 281.965,85.293 288.087,91.415 288.087,96.698 R3.1@294.386,102.997
VPOS16: U30.14 U64.10 | length 42.8
  Top Layer w0.635: v1(75.946,42.443) 76.708,42.443 77.775,41.377 77.775,37.338 79.053,36.06 U30.14@79.053,26.289
  Bottom Layer w0.635: U64.10@54.737,48.042 54.737,45.618 56.134,44.221 74.168,44.221 v1(75.946,42.443)
VPOS32: U30.13 U64.5 | length 37.5
  Top Layer w0.635: U64.5@54.737,40.422 54.737,33.706 v1(60.604,27.838)
  Bottom Layer w0.635: v1(60.604,27.838) 81.568,27.838 81.593,27.813 U30.13@81.593,26.289
VPOS256: U26.5 U28.3 U30.15 U63.3 | length 134.3
  Top Layer w0.635: v1(52.324,55.315) 52.324,59.258 49.657,61.925 U63.3@49.657,62.176 49.657,64.186 50.924,65.453 50.924,93.088 53.111,95.275 v1(53.111,101.625) ; v1(66.212,54.229) 70.637,49.803 70.637,27.305 73.177,24.765 75.235,24.765 76.513,26.043 U30.15@76.513,26.289
  Bottom Layer w0.635: U26.5@23.368,105.682 23.368,104.165 35.479,104.165 35.633,104.319 38.533,104.319 38.686,104.165 48.387,104.165 U28.3@49.657,105.435 ; U28.3@49.657,105.682 U28.3@49.657,105.435 ; v1(52.324,55.315) 65.126,55.315 v1(66.212,54.229) ; v1(53.111,101.625) 51.841,101.625 49.657,103.81 U28.3@49.657,105.435
VRESET: U7.8 U12.2 U32.5 U33.5 U33.12 | length 271.2
  Top Layer w0.635: U33.12@18.288,178.562 18.288,177.165 23.368,172.085 U33.5@23.368,170.942 23.368,163.601 24.638,162.331 24.638,153.06 23.368,151.79 U32.5@23.368,148.611 ; v1(141.859,118.085) 141.87,118.095 U12.2@141.87,127.435 ; v1(217.572,116.18) 218.842,114.91 U7.8@218.842,113.302
  Bottom Layer w0.635: U33.5@23.368,170.942 23.368,167.005 26.772,163.601 38.354,163.601 41.037,160.918 41.037,146.232 42.338,146.232 50.046,138.523 65.346,138.523 72.472,131.397 87.157,131.397 88.078,132.318 96.339,132.318 98.573,130.084 117.206,130.084 118.3,128.989 141.538,128.989 U12.2@141.87,127.435 ; v1(141.859,118.085) 163.59,118.085 164.274,117.401 184.089,117.401 185.31,116.18 v1(217.572,116.18)
VVID: U12.13 U40.1 U40.4 U52.8 | length 227.9
  Top Layer w0.635: v1(190.348,135.484) 190.348,120.628 191.618,119.358 191.618,49.168 193.13,47.656 193.13,43.624 v1(197.536,39.218)
  Bottom Layer w0.635: U12.13@141.87,135.055 141.87,136.648 189.183,136.648 v1(190.348,135.484) ; v1(197.536,39.218) 203.602,39.218 U40.1@203.602,40.422 203.602,41.91 204.335,42.643 210.087,42.643 211.222,41.508 U40.4@211.222,40.422 211.963,40.422 211.963,39.903 212.979,38.887 219.532,38.887 220.396,39.751 220.396,43.378 236.652,59.634 245.44,59.634 245.44,60.452 245.643,60.655 245.643,63.83 246.131,64.318 248.036,64.318 251.995,68.276 U52.8@251.995,69.796
pads on no net: CP1.0 J1.0 J1.2 J1.3 J1.4 J1.SH J2.3 U2.2 U2.5 U2.6 U2.8 U2.9 U2.10 U2.11 U6.9 U6.10 U6.13 U15.3 U15.6 U19.15 U20.3 U20.11 U21.5 U23.15 U24.13 U24.14 U25.11 U25.12 U25.13 U25.14 U27.3 U27.11 U29.13 U29.14 U30.11 U30.12 U31.13 U31.14 U31.15 U35.2 U35.6 U37.8 U37.9 U37.10 U37.11 U37.12 U37.13 U40.2 U41.6 U41.8 U42.6 U43.9 U51.10 U51.11 U51.12 U51.13 U52.6 U60.8 U60.9 U60.10 U60.11 U61.9 U61.10 U61.13 U63.5 U63.8 U63.9 U63.10 U63.11 U63.12 U63.13

## Keep-outs
Keep-Out Layer:
  lines w0.254: 320.929,8.636 320.929,7.239 282.829,7.239 282.829,8.89 279.781,8.89 279.781,9.144 14.859,9.144 7.239,9.144 7.239,204.47 288.036,204.47 288.036,204.216 356.489,204.216

## Text inside footprints (layer, text, board x,y; h text height)
R6: Top Overlay "CW" at 293.816,32.469 h0.64 r180
R10: Top Overlay "CW" at 293.816,11.006 h0.64 r180